# Altium PCB CropSenseMovement_REV03.PcbDoc
Units mil, origin at the board's own origin, x right, y up, seen from the top; angles counter-clockwise.
Board outline 3937.01 x 3149.61 mil, 2 copper layers (Top, Bottom), stack 61.811 mil thick; 50 components, 63 nets, 223 pads, 0 vias.
Unrouted connection lines stored in the file: 10.
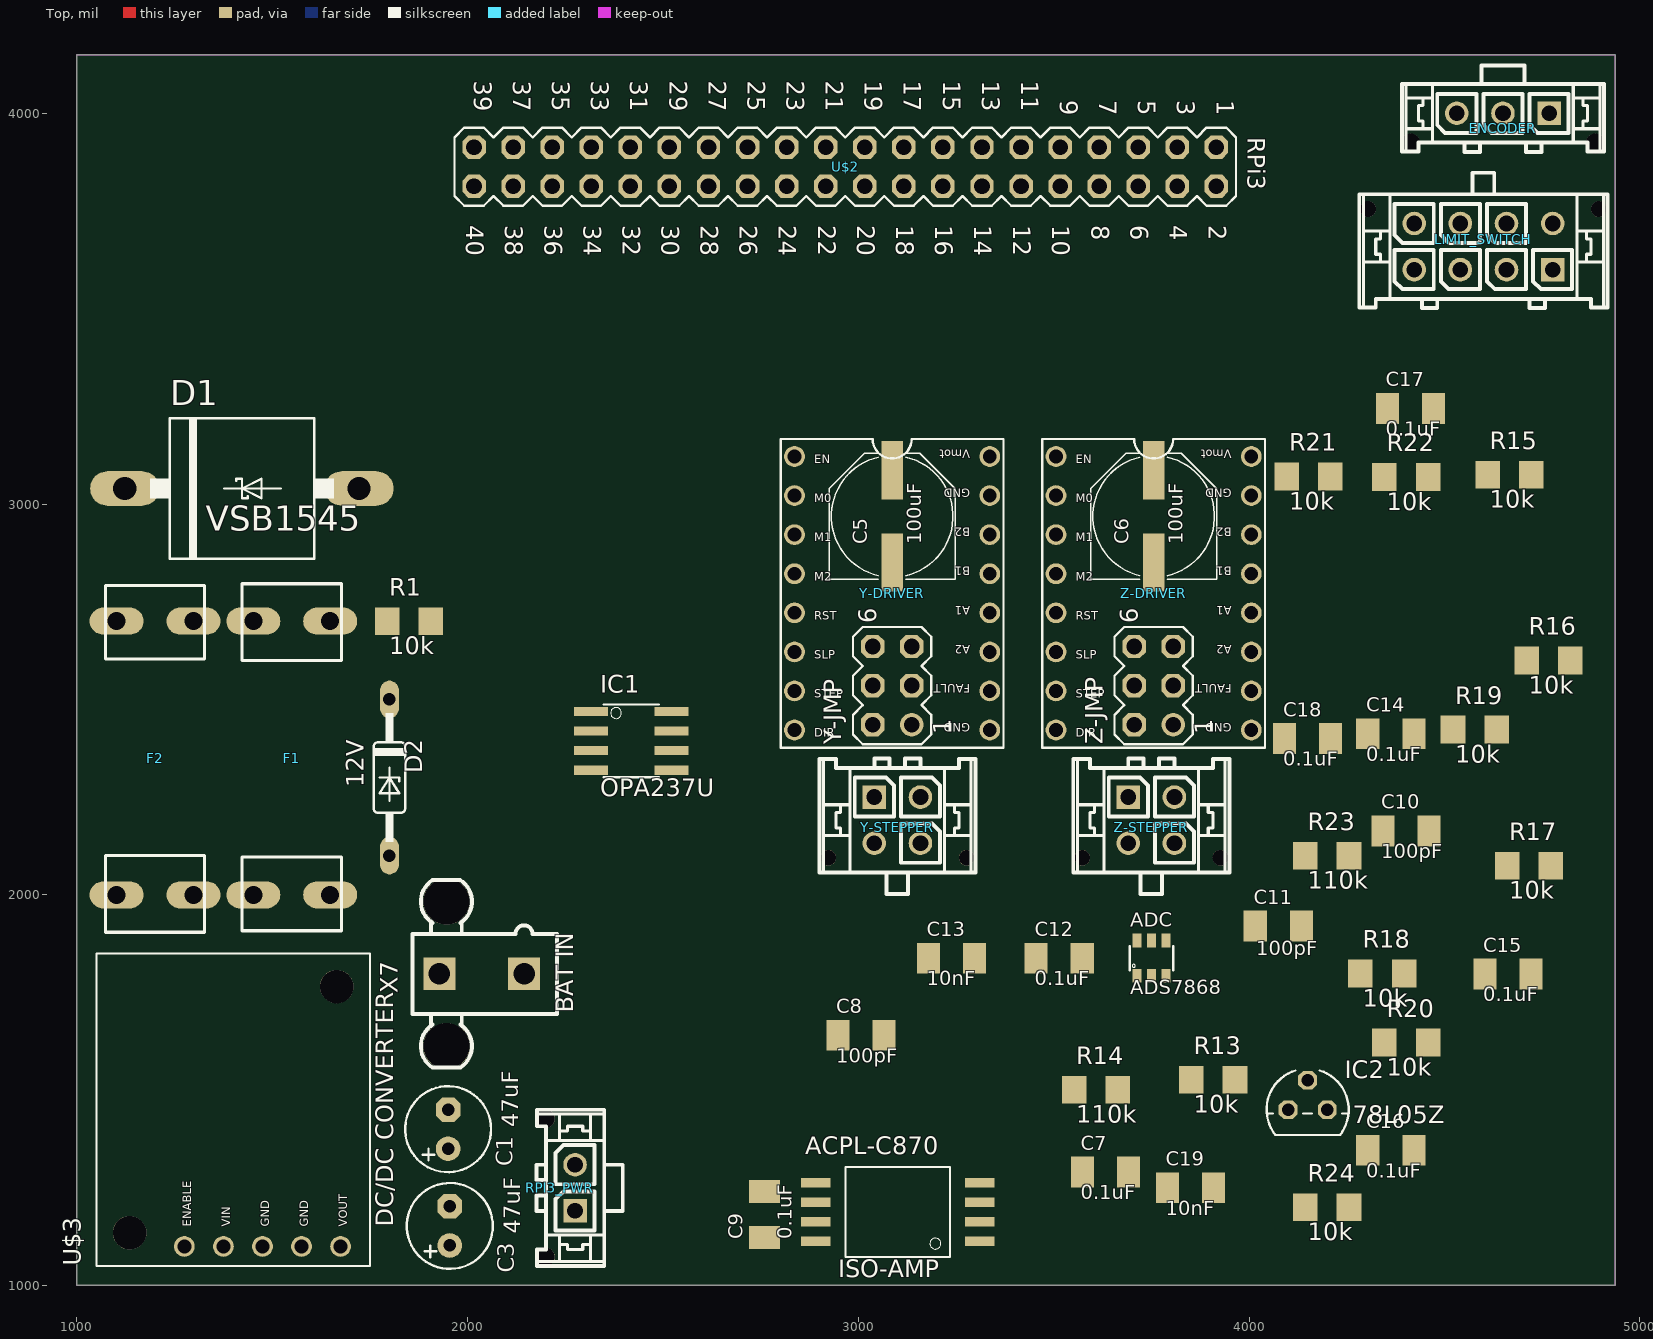
[diagram p0: Top view]
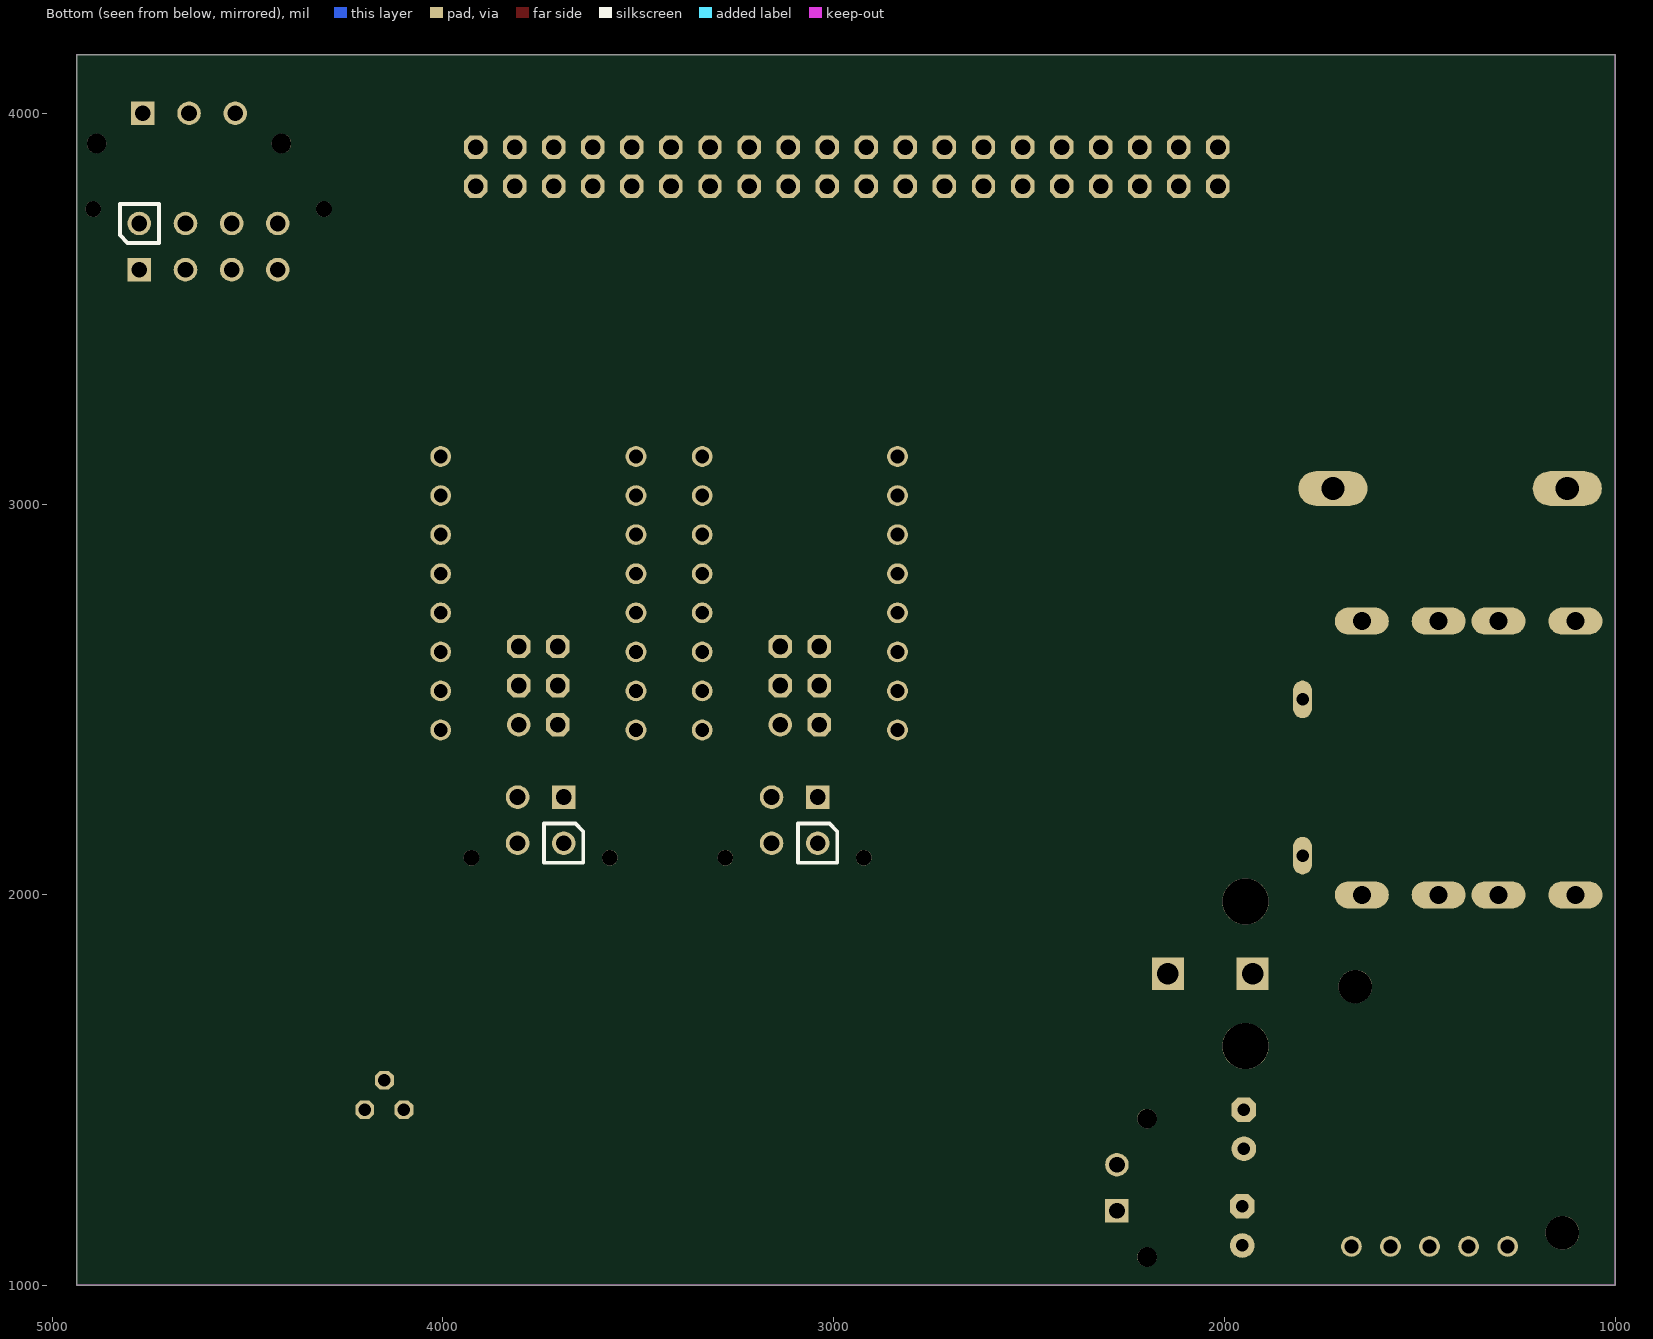
[diagram p1: Bottom view, seen from below]

## Layer stack, top to bottom
Top Solder: solder mask 0.4, Solder Resist, Dk 3.5
Top: signal copper 1.378
Dielectric 1: core 59.0551, FR-4, Dk 4.8
Bottom: signal copper 1.378
Bottom Solder: solder mask 0.4, Solder Resist, Dk 3.5

## Board outline
1000,1000 4937.01,1000 4937.01,4149.61 1000,4149.61

## Design rules (kind name [scope] priority, off if disabled: settings)
Clearance [All] p1: gap=8 except(0: SMDPad-SMDPad SMDPad-THPad SMDPad-Via)
Clearance "Clearance (Same Net)" [All] p2: gap=0 except(8: SMDPad-SMDPad SMDPad-THPad SMDPad-Via)
HoleSize HoleSize_1 [All] p1: absolutevalues=TRUE maxlimit=100000 minlimit=24 maxpercent=80.000 minpercent=20.000
HoleSize [All] p2: absolutevalues=TRUE maxlimit=100 minlimit=1 maxpercent=80.000 minpercent=20.000
HoleToHoleClearance mdViaViaSameLayer [All] p1: gap=8 allowstackedmicrovias=TRUE
HoleToHoleClearance [All] p2: gap=10 allowstackedmicrovias=TRUE
PasteMaskExpansion mlMinCreamFrame [All] p1: expansion=0
PasteMaskExpansion [All] p2: expansion=0
PolygonConnect ThermalVias [IsVia] p1: connectstyle=Direct reliefconductorwidth=10 reliefentries=4 polygonreliefangle="90 Angle" airgapwidth=10
PolygonConnect [All] p2: connectstyle=Relief reliefconductorwidth=10 reliefentries=4 polygonreliefangle="90 Angle" airgapwidth=10
RoutingVias [All] p1: holewidth=28 width=50 viastyle="Through Hole" minholewidth=28 minwidth=50 maxholewidth=28 maxwidth=50
SilkToSilkClearance [All] p1 off: silktosilkclearance=10
SilkToSolderMaskClearance [IsPad] p1 off: minsilkscreentomaskgap=10 clearancetoexposedcopper=TRUE
SolderMaskExpansion mlMinStopFrame [All] p1: expansion=4
SolderMaskExpansion [All] p2: expansion=4
Width Width_1 [All] p1: maxlimit=100000 minlimit=10 preferedwidth=10
Width [All] p2: maxlimit=10 minlimit=10 preferedwidth=10
25 further rules are at their usual default settings.

## Components (designator, comment, footprint, x,y, rotation, side; value= is the part's Value field where it differs from the comment)
ADC "ADS7868" SOT-23-6 3750.39,1837.8 r0 top
C1 "47uF" E2,5-6 1950,1400 r90 top
C3 "47uF" E2,5-6 1954.53,1152.36 r90 top
C5 "100uF" PANASONIC_E 3086.61,2968.5 r90 top
C6 "100uF" PANASONIC_E 3755.91,2968.5 r90 top
C7 "0.1uF" C1206K 3632.68,1290.16 r0 top
C8 "100pF" C1206K 3007.09,1640.16 r0 top
C9 "0.1uF" C1206K 2759.84,1181.5 r90 top
C10 "100pF" C1206K 4401.57,2163.39 r0 top
C11 "100pF" C1206K 4075,1920 r0 top
C12 "0.1uF" C1206K 3514.17,1837.8 r0 top
C13 "10nF" C1206K 3238.58,1837.8 r0 top
C14 "0.1uF" C1206K 4362.99,2412.2 r0 top
C15 "0.1uF" C1206K 4662.99,1797.24 r0 top
C16 "0.1uF" C1206K 4362.99,1346.06 r0 top
C17 "0.1uF" C1206K 4412.99,3244.88 r0 top
C18 "0.1uF" C1206K 4150,2400 r0 top
C19 "10nF" C1206K 3850,1250 r0 top
D1 "VSB1545" P6T15 1422.44,3039.76 r0 top
D2 "12V" DO35Z10 1800,2300 r270 top
ENCODER "" 43650-0315 4650,4000 r0 top
F1 "" 5X20MM_LITTLEFUSE_CARTRIDGE 1550,2350 r0 top
F2 "" 5X20MM_LITTLEFUSE_CARTRIDGE 1200,2350 r180 top
IC1 "OPA237U" SO08 2418.9,2394.09 r270 top
IC2 "78L05Z" TO92 4150,1450 r0 top
ISO-AMP "ACPL-C870" SSO-8 3101.18,1188.19 r90 top
LIMIT_SWITCH "" 43045-0812 4600,3600 r0 top
R1 "10k" R1206 1850,2700 r0 top
R13 "10k" R1206 3908.27,1526.38 r0 top
R14 "110k" R1206 3608.27,1500.79 r0 top
R15 "10k" R1206 4666.54,3075.2 r0 top
R16 "10k" R1206 4766.54,2599.61 r0 top
R17 "10k" R1206 4716.54,2074.02 r0 top
R18 "10k" R1206 4340.94,1798.43 r0 top
R19 "10k" R1206 4577.95,2422.83 r0 top
R20 "10k" R1206 4402.36,1621.65 r0 top
R21 "10k" R1206 4152.36,3070.47 r0 top
R22 "10k" R1206 4402.36,3069.29 r0 top
R23 "110k" R1206 4200,2100 r0 top
R24 "10k" R1206 4200,1200 r0 top
RPI3_PWR "" 43650-0215 2275,1250 r270 top
U$2 "" CONNECTOR 2966.54,3863.39 r180 top
U$3 "" D24VXXFX_BREAKOUT 1400,1450 r0 top
X7 "BAT IN" 5566-2 2036.22,1797.64 r90 top
Y-DRIVER "" DRV8825BREAKOUT 3086.61,2771.65 r270 top
Y-JMP "" MA03-2 3086.61,2535.43 r90 top
Y-STEPPER "" 43045-0412 3100,2250 r180 top
Z-DRIVER "" DRV8825BREAKOUT 3755.91,2771.65 r270 top
Z-JMP "" MA03-2 3755.91,2535.43 r90 top
Z-STEPPER "" 43045-0412 3750,2250 r180 top

## Footprints (in the part's own frame and the unit in brackets; to place one, negate y for a bottom-side part, rotate by r counter-clockwise, add the part's x,y. Pads: shape width x height; smd on the part's side, far side on the other; paste and mask are expansions set on the pad)
5X20MM_LITTLEFUSE_CARTRIDGE [mil] "5X20MM_LITTLEFUSE_CARTRIDGE"
  oval 138.18x69.09 hole 46.06: 1(-98.43,-350.39) 2(98.43,-350.39) 3(98.43,350.39) 4(-98.43,350.39)
  silkscreen extent -127,-442 127,446
5566-2 [mm] "5566-2"
  round 3 hole 3: 1(-4.7,2.29) 1(4.7,2.29)
  rect 2.1x2.1 hole 1.4: 1(0,-2.75) 2(0,2.75)
  silkscreen extent -6.1,-4.9 6.1,4.5
43045-0412 [mm] "43045-0412"
  round 1.02 hole 1.02: 1(-4.5,3.94) 1(4.5,3.94)
  rect 1.53x1.53 hole 1.02: P$1(1.5,0)
  round 1.53 hole 1.02: P$2(-1.5,0) P$3(1.5,3) P$4(-1.5,3)
  silkscreen extent -5.07,-2.5 5.07,6.3
43045-0812 [mm] "43045-0812"
  round 1.02 hole 1.02: 1(-7.5,3.94) 1(7.5,3.94)
  rect 1.53x1.53 hole 1.02: P$1(4.5,0)
  round 1.53 hole 1.02: P$2(1.5,0) P$3(-1.5,0) P$4(-4.5,0) P$5(4.5,3) P$6(1.5,3) P$7(-1.5,3) P$8(-4.5,3)
  silkscreen extent -8.07,-2.5 8.07,6.3
43650-0215 [mil] "43650-0215"
  round 50 hole 50: 1(-177.17,-77.17) 1(177.17,-77.17)
  rect 60.24x60.24 hole 40.16: P$1(59.06,0)
  round 60.24 hole 40.16: P$2(-59.06,0)
  silkscreen extent -200,-98 200,122
43650-0315 [mm] "43650-0315"
  round 1.27 hole 1.27: 1(-6,-1.96) 1(6,-1.96)
  rect 1.53x1.53 hole 1.02: P$1(3,0)
  round 1.53 hole 1.02: P$2(0,0) P$3(-3,0)
  silkscreen extent -6.58,-2.5 6.58,3.1
C1206K [mm] "C1206K"
  rect 1.5x2 smd: 1(-1.5,0) 2(1.5,0)
CONNECTOR [mil] "CONNECTOR"
  oct 60x60 hole 40: 1(-950,-50) 2(-950,50) 3(-850,-50) 4(-850,50) 5(-750,-50) 6(-750,50) 7(-650,-50) 8(-650,50) 9(-550,-50) 10(-550,50) 11(-450,-50) 12(-450,50) 13(-350,-50) 14(-350,50) 15(-250,-50) 16(-250,50) 17(-150,-50) 18(-150,50) 19(-50,-50) 20(-50,50) 21(50,-50) 22(50,50) 23(150,-50) 24(150,50) 25(250,-50) 26(250,50) 27(350,-50) 28(350,50) 29(450,-50) 30(450,50) 31(550,-50) 32(550,50) 33(650,-50) 34(650,50) 35(750,-50) 36(750,50) 37(850,-50) 38(850,50) 39(950,-50) 40(950,50)
  silkscreen extent -1000,-100 1000,100
D24VXXFX_BREAKOUT [mil] "D24VXXFX_BREAKOUT"
  round 86 hole 86: 1(-265,-315) 1(265,315)
  round 53.15 hole 35.43: EN(-125,-350) GND0(75,-350) GND1(175,-350) VIN(-25,-350) VOUT(275,-350)
  silkscreen extent -350,-400 350,400
DO35Z10 [mil] "DO35Z10"
  oval 96x48 hole 32: A(200,0) C(-200,0)
  silkscreen extent -165,-40 165,40
DRV8825BREAKOUT [mil] "DRV8825BREAKOUT"
  round 53.15 hole 35.43: A1(50,250) A2(150,250) B1(-50,250) B2(-150,250) DIR(350,-250) EN(-350,-250) FAULT(250,250) GND(-250,250) GND0(350,250) M0(-250,-250) M1(-150,-250) M2(-50,-250) RST(50,-250) SLP(150,-250) STEP(250,-250) VMOT(-350,250)
  silkscreen extent -395,-285 395,285
E2,5-6 [mil] "E2,5-6"
  round 63 hole 32: +(-50,0)
  oct 63x63 hole 32: -(50,0)
  silkscreen extent -110,-110 110,110
MA03-2 [mil] "MA03-2"
  round 60 hole 40: 1(-100,-50)
  oct 60x60 hole 40: 2(-100,50) 3(0,-50) 4(0,50) 5(100,-50) 6(100,50)
  silkscreen extent -150,-100 150,100
P6T15 [mil] "P6T15"
  oval 177x88.5 hole 59: A(300,0) C(-300,0)
  silkscreen extent -235,-180 235,180
PANASONIC_E [mm] "PANASONIC_E"
  rect 3.8x1.4 smd: +(3,0) -(-3,0)
  silkscreen extent -4.1,-4.1 4.1,4.1
R1206 [mil] "R1206"
  rect 62.99x70.98 smd: 1(-55.98,0) 2(55.98,0)
SO08 [mil] "SO08"
  rect 24x87 smd: 1(-75,-103) 2(-25,-103) 3(25,-103) 4(75,-103) 5(75,103) 6(25,103) 7(-25,103) 8(-75,103)
  silkscreen extent -93,-71 93,71
SOT-23-6 [mil] "SOT-23-6"
  rect 23.62x35.43 smd: 1(-37.4,-45.28) 2(0,-45.28) 3(37.4,-45.28) 4(37.4,45.28) 5(0,45.28) 6(-37.4,45.28)
  silkscreen extent -56,-31 56,31
SSO-8 [mil] "SSO-8"
  rect 25x75 smd: 1(-75,-210) 2(-25,-210) 3(25,-210) 4(75,-210) 5(-75,210) 6(-25,210) 7(25,210) 8(75,210)
  silkscreen extent -115,-134 115,134
TO92 [mil] "TO92"
  oct 48x48 hole 32: 1(-50,0) 2(0,75) 3(50,0)
  silkscreen extent -105,-65 105,100

## Part data
ADC: library part SOT-23-6
C1 C3: library part E2,5-6
C5 C6: library part PANASONIC_E
C7 C8 C9 C10 C11 C12 C13 C14 C15 C16 C17 C18 C19: library part C1206K
D1: library part P6T15
D2: library part DO35Z10
ENCODER: library part 43650-0315
F1 F2: library part 5X20MM_LITTLEFUSE_CARTRIDGE
IC1: library part SO08
IC2: library part TO92
ISO-AMP: library part SSO-8
LIMIT_SWITCH: library part 43045-0812
R1 R13 R14 R15 R16 R17 R18 R19 R20 R21 R22 R23 R24: library part R1206
RPI3_PWR: library part 43650-0215
U$2: library part CONNECTOR
U$3: library part D24VXXFX_BREAKOUT
X7: library part 5566-2
Y-DRIVER Z-DRIVER: library part DRV8825BREAKOUT
Y-JMP Z-JMP: library part MA03-2
Y-STEPPER Z-STEPPER: library part 43045-0412

## Nets (pads, with @x,y where several pads share a name; then routed paths per layer and width w, separated by ;. In a path a pad name is that pad's centre, name@x,y a point inside that pad or via, vN(x,y) a via of type N, cw(c..) or ccw(c..) an arc to the next point about the centre after c; other vN are vias at no path point)
3.3V: ADC.1 C12.1 ENCODER.P$1 R24.1 U$2.1
5V: C3.+ RPI3_PWR.P$1 U$3.VOUT Y-DRIVER.RST Y-JMP.1 Y-JMP.3 Y-JMP.5 Z-DRIVER.RST Z-JMP.1 Z-JMP.3 Z-JMP.5
12V: C5.+ C6.+ D1.C F2.1 F2.2 Y-DRIVER.VMOT Z-DRIVER.VMOT
+5V: C9.1 C13.1 IC1.7 ISO-AMP.8
+24V: R14.2 R23.2
GND: C1.- C3.- C5.- C6.- C7.2 C8.2 C14.2 C15.2 C16.2 C17.2 C18.2 C19.2 D2.A ENCODER.P$3 IC2.2 ISO-AMP.3 ISO-AMP.4 LIMIT_SWITCH.P$5 LIMIT_SWITCH.P$6 LIMIT_SWITCH.P$7 LIMIT_SWITCH.P$8 R13.1 RPI3_PWR.P$2 U$3.GND0 U$3.GND1 X7.1@2144.49,1797.64 Y-DRIVER.GND Y-DRIVER.GND0 Z-DRIVER.GND Z-DRIVER.GND0
GND-ISO: ADC.2 C9.2 C11.1 C12.2 C13.2 IC1.4 ISO-AMP.5 R18.1
N$1: D2.C R1.2
N$2: D1.A F1.3 F1.4 R1.1
N$4: F1.1 F1.2 X7.2
N$5: C1.+ F2.3 F2.4 U$3.VIN
N$11: Y-DRIVER.B2 Y-STEPPER.P$1
N$12: Y-DRIVER.B1 Y-STEPPER.P$2
N$13: Y-DRIVER.A1 Y-STEPPER.P$3
N$14: Y-DRIVER.A2 Y-STEPPER.P$4
N$15: Y-DRIVER.M0 Y-JMP.6
N$16: Y-DRIVER.M1 Y-JMP.4
N$17: Y-DRIVER.M2 Y-JMP.2
N$19: LIMIT_SWITCH.P$3 R20.1
N$21: LIMIT_SWITCH.P$2 R22.1
N$22: LIMIT_SWITCH.P$1 R21.1
N$23: U$2.19
N$24: U$2.15
N$25: U$2.13
N$26: U$2.11
N$27: U$2.7
N$28: U$2.5
N$29: U$2.3
N$30: U$2.8
N$31: U$2.10
N$32: U$2.12
N$33: U$2.16
N$34: U$2.18
N$36: Z-DRIVER.B2 Z-STEPPER.P$1
N$39: Z-DRIVER.B1 Z-STEPPER.P$2
N$40: Z-DRIVER.A1 Z-STEPPER.P$3
N$41: Z-DRIVER.M0 Z-JMP.6
N$42: Z-DRIVER.M1 Z-JMP.4
N$43: Z-DRIVER.M2 Z-JMP.2
N$44: Z-DRIVER.A2 Z-STEPPER.P$4
N$54: C7.1 IC2.1 ISO-AMP.1
N$55: C8.1 ISO-AMP.2 R13.2 R14.1
N$56: ISO-AMP.7 R15.2
N$57: ISO-AMP.6 R16.2
N$58: C11.2 IC1.3 R15.1 R18.2
N$59: IC1.2 R16.1 R17.2
N$60: ADC.3 IC1.6 R17.1
N$61: IC2.3 R23.1
N$62: LIMIT_SWITCH.P$4 R19.1
SPI_CLK: ADC.4 U$2.23
SPI_MISO: ADC.5 U$2.21
VSENSE_CS: ADC.6 U$2.29
X-ENC: C19.1 ENCODER.P$2 R24.2 U$2.32
Y-DIR: U$2.36 Y-DRIVER.DIR
Y-MAX: C16.1 R21.2 U$2.37
Y-MIN: C17.1 R22.2 U$2.35
Y-SLEEP: U$2.40 Y-DRIVER.SLP
Y-STEP: U$2.38 Y-DRIVER.STEP
Z-DIR: U$2.22 Z-DRIVER.DIR
Z-MAX: C15.1 R20.2 U$2.33
Z-MIN: C14.1 R19.2 U$2.31
Z-SLEEP: U$2.26 Z-DRIVER.SLP
Z-STEP: U$2.24 Z-DRIVER.STEP
pads on no net: C10.1 C10.2 C18.1 ENCODER.1 IC1.1 IC1.5 IC1.8 LIMIT_SWITCH.1 RPI3_PWR.1 U$2.2 U$2.4 U$2.6 U$2.9 U$2.14 U$2.17 U$2.20 U$2.25 U$2.27 U$2.28 U$2.30 U$2.34 U$2.39 U$3.1 U$3.EN X7.1@1946.06,1612.6 X7.1@1946.06,1982.68 Y-DRIVER.EN Y-DRIVER.FAULT Y-STEPPER.1 Z-DRIVER.EN Z-DRIVER.FAULT Z-STEPPER.1

## Keep-outs
Keep-Out Layer:
  the board outline again, w0

## Silkscreen, mask and mechanical layers (free items; w line width, h text height)
Dimension:
  the board outline again, w0
Unrouted:
  lines w0: 1101.57,1999.61 1298.43,1999.61 1375,1100 1950,1350 ; 1122.44,3039.76 1101.57,2700.39 1298.43,2700.39 3086.61,3086.61 3336.61,3121.65 3755.91,3086.61 4005.91,3121.65 ; 1451.57,1999.61 1648.43,1999.61 1927.95,1797.64 ; 1451.57,2700.39 1648.43,2700.39 1794.02,2700 1722.44,3039.76 ; 1475,1100 1575,1100 1954.53,1202.36 1950,1450 ; 1675,1100 1954.53,1102.36 2275,1190.94 3136.61,2435.43 3136.61,2535.43 3136.61,2635.43 ; 1800,2100 2144.49,1797.64 1950,1450 ; 1800,2500 1905.98,2700 ; 2016.54,3813.39 2836.61,2621.65 ; 2116.54,3813.39 2836.61,2521.65 ; 2116.54,3913.39 4208.35,3070.47 4303.94,1346.06 ; 2216.54,3813.39 2836.61,2421.65 ; 2216.54,3913.39 4353.94,3244.88 4458.35,3069.29 ; 2315.9,2319.09 3297.64,1837.8 ; 2315.9,2369.09 4085.04,1837.8 4396.93,1798.43 4610.55,3075.2 ; 2315.9,2419.09 4710.55,2599.61 4772.52,2074.02 ; 2316.54,3913.39 4603.94,1797.24 4458.35,1621.65 ; 2416.54,3813.39 4650,4000 4255.98,1200 3790.94,1250 ; 2416.54,3913.39 4303.94,2412.2 4633.94,2422.83 ; 2516.54,3913.39 3712.99,1883.07 ; 2521.9,2369.09 3787.8,1792.52 4660.55,2074.02 ; 2521.9,2419.09 3179.53,1837.8 2891.18,1263.19 2759.84,1122.44 ; 2716.54,3813.39 3505.91,2621.65 ; 2816.54,3813.39 3505.91,2521.65 ; 2816.54,3913.39 3787.8,1883.07 ; 2836.61,2721.65 3136.61,2635.43 ; 2836.61,2821.65 3036.61,2435.43 ; 2836.61,2921.65 3036.61,2535.43 ; 2836.61,3021.65 3036.61,2635.43 ; 2891.18,1113.19 2759.84,1240.55 3297.64,1837.8 ; 2891.18,1163.19 4822.52,2599.61 ; 2891.18,1213.19 4722.52,3075.2 ; 2916.54,3813.39 3505.91,2421.65 ; 2916.54,3913.39 3750.39,1883.07 ; 2948.03,1640.16 3311.18,1163.19 3552.28,1500.79 3964.25,1526.38 ; 3040.94,2131.89 3336.61,2721.65 ; 3040.94,2250 3336.61,2921.65 ; 3159.06,2131.89 3336.61,2621.65 ; 3159.06,2250 3336.61,2821.65 ; 3311.18,1113.19 3573.62,1290.16 4100,1450 ; 3311.18,1213.19 3311.18,1263.19 ; 3336.61,2421.65 3086.61,2850.39 3336.61,3021.65 3755.91,2850.39 4005.91,3021.65 ; 3455.12,1837.8 3712.99,1792.52 ; 3505.91,2821.65 3705.91,2435.43 ; 3505.91,2921.65 3705.91,2535.43 ; 3505.91,3021.65 3705.91,2635.43 ; 3664.25,1500.79 4255.98,2100 ; 3690.94,2131.89 4005.91,2721.65 ; 3690.94,2250 4005.91,2921.65 ; 3805.91,2435.43 3805.91,2535.43 3805.91,2635.43 3505.91,2721.65 3136.61,2635.43 ; 3809.06,2131.89 4005.91,2621.65 ; 3809.06,2250 4005.91,2821.65 ; 3916.54,3913.39 4768.11,4000 3712.99,1792.52 ; 4005.91,2421.65 4209.06,2400 ; 4096.38,3070.47 4777.17,3600 ; 4144.02,1200 3712.99,1792.52 ; 4144.02,2100 4200,1450 ; 4284.96,1798.43 3966.93,1837.8 3750.39,1792.52 3573.23,1837.8 3297.64,1837.8 ; 4346.38,1621.65 4540.94,3600 ; 4346.38,3069.29 4659.06,3600 ; 4422.83,3600 4521.97,2422.83 ; 4422.83,3718.11 4540.94,3718.11 4659.06,3718.11 ; 4777.17,3718.11 4659.06,3718.11 ; 1950,1450 2275,1309.06 3066.14,1640.16 3311.18,1263.19 ; 3311.18,1263.19 3691.73,1290.16 3909.06,1250 3852.28,1526.38 4150,1525 4422.05,1346.06 4722.05,1797.24 4422.05,2412.2 4209.06,2400 ; 4005.91,3021.65 4531.89,4000 4209.06,2400 ; 4005.91,3021.65 4472.05,3244.88 4659.06,3718.11

## Text inside footprints (layer, text, board x,y; h text height)
U$2: Top Overlay "39" at 2001.54,4083.39 h77.5 r270; Top Overlay "37" at 2101.54,4083.39 h77.5 r270; Top Overlay "35" at 2201.54,4083.39 h77.5 r270; Top Overlay "33" at 2301.54,4083.39 h77.5 r270; Top Overlay "31" at 2401.54,4083.39 h77.5 r270; Top Overlay "29" at 2501.54,4083.39 h77.5 r270; Top Overlay "27" at 2601.54,4083.39 h77.5 r270; Top Overlay "25" at 2701.54,4083.39 h77.5 r270; Top Overlay "23" at 2801.54,4083.39 h77.5 r270; Top Overlay "21" at 2901.54,4083.39 h77.5 r270; Top Overlay "19" at 3001.54,4083.39 h77.5 r270; Top Overlay "17" at 3101.54,4083.39 h77.5 r270; Top Overlay "15" at 3201.54,4083.39 h77.5 r270; Top Overlay "13" at 3301.54,4083.39 h77.5 r270; Top Overlay "11" at 3401.54,4083.39 h77.5 r270; Top Overlay "9" at 3501.54,4033.39 h77.5 r270; Top Overlay "7" at 3601.54,4033.39 h77.5 r270; Top Overlay "5" at 3701.54,4033.39 h77.5 r270; Top Overlay "3" at 3801.54,4033.39 h77.5 r270; Top Overlay "2" at 3881.54,3713.39 h77.5 r270; Top Overlay "4" at 3781.54,3713.39 h77.5 r270; Top Overlay "6" at 3681.54,3713.39 h77.5 r270; Top Overlay "8" at 3581.54,3713.39 h77.5 r270; Top Overlay "10" at 3481.54,3713.39 h77.5 r270; Top Overlay "12" at 3381.54,3713.39 h77.5 r270; Top Overlay "14" at 3281.54,3713.39 h77.5 r270; Top Overlay "16" at 3181.54,3713.39 h77.5 r270; Top Overlay "18" at 3081.54,3713.39 h77.5 r270; Top Overlay "20" at 2981.54,3713.39 h77.5 r270; Top Overlay "22" at 2881.54,3713.39 h77.5 r270; Top Overlay "24" at 2781.54,3713.39 h77.5 r270; Top Overlay "26" at 2681.54,3713.39 h77.5 r270; Top Overlay "28" at 2581.54,3713.39 h77.5 r270; Top Overlay "30" at 2481.54,3713.39 h77.5 r270; Top Overlay "32" at 2381.54,3713.39 h77.5 r270; Top Overlay "34" at 2281.54,3713.39 h77.5 r270; Top Overlay "36" at 2181.54,3713.39 h77.5 r270; Top Overlay "38" at 2081.54,3713.39 h77.5 r270; Top Overlay "40" at 1981.54,3713.39 h77.5 r270; Top Overlay "RPi3" at 3981.54,3938.39 h77.5 r270; Top Overlay "1" at 3901.54,4033.39 h77.5 r270
U$3: Top Overlay "DC/DC CONVERTER" at 1825,1150 h77.5 r90; Top Overlay "GND" at 1600,1150 h37.2 r90; Top Overlay "VOUT" at 1700,1150 h37.2 r90; Top Overlay "GND" at 1500,1150 h37.2 r90; Top Overlay "VIN" at 1400,1150 h37.2 r90; Top Overlay "ENABLE" at 1300,1150 h37.2 r90
Y-DRIVER: Top Overlay "SLP" at 2886.61,2596.65 h37.2; Top Overlay "GND" at 3286.61,2446.65 h37.2 r180; Top Overlay "FAULT" at 3286.61,2546.65 h37.2 r180; Top Overlay "A2" at 3286.61,2646.65 h37.2 r180; Top Overlay "A1" at 3286.61,2746.65 h37.2 r180; Top Overlay "B1" at 3286.61,2846.65 h37.2 r180; Top Overlay "B2" at 3286.61,2946.65 h37.2 r180; Top Overlay "GND" at 3286.61,3046.65 h37.2 r180; Top Overlay "Vmot" at 3286.61,3146.65 h37.2 r180; Top Overlay "DIR" at 2886.61,2396.65 h37.2; Top Overlay "STEP" at 2886.61,2496.65 h37.2; Top Overlay "RST" at 2886.61,2696.65 h37.2; Top Overlay "M2" at 2886.61,2796.65 h37.2; Top Overlay "M1" at 2886.61,2896.65 h37.2; Top Overlay "M0" at 2886.61,2996.65 h37.2; Top Overlay "EN" at 2886.61,3096.65 h37.2
Y-JMP: Top Overlay "6" at 3061.61,2695.43 h77.5 r90; Top Overlay "1" at 3251.61,2410.43 h77.5 r90
Z-DRIVER: Top Overlay "SLP" at 3555.91,2596.65 h37.2; Top Overlay "GND" at 3955.91,2446.65 h37.2 r180; Top Overlay "FAULT" at 3955.91,2546.65 h37.2 r180; Top Overlay "A2" at 3955.91,2646.65 h37.2 r180; Top Overlay "A1" at 3955.91,2746.65 h37.2 r180; Top Overlay "B1" at 3955.91,2846.65 h37.2 r180; Top Overlay "B2" at 3955.91,2946.65 h37.2 r180; Top Overlay "GND" at 3955.91,3046.65 h37.2 r180; Top Overlay "Vmot" at 3955.91,3146.65 h37.2 r180; Top Overlay "DIR" at 3555.91,2396.65 h37.2; Top Overlay "STEP" at 3555.91,2496.65 h37.2; Top Overlay "RST" at 3555.91,2696.65 h37.2; Top Overlay "M2" at 3555.91,2796.65 h37.2; Top Overlay "M1" at 3555.91,2896.65 h37.2; Top Overlay "M0" at 3555.91,2996.65 h37.2; Top Overlay "EN" at 3555.91,3096.65 h37.2
Z-JMP: Top Overlay "6" at 3730.91,2695.43 h77.5 r90; Top Overlay "1" at 3920.91,2410.43 h77.5 r90